# Altium PCB BLDC_Gimbal.PcbDoc (part 3 of 3)
Units mil, origin at the board's own origin, x right, y up, seen from the top; angles counter-clockwise.
Board outline 4133.86 x 2204.72 mil, 4 copper layers (Top Layer, GND, Power, Bottom Layer), stack 23.756 mil thick; 131 components, 105 nets, 517 pads, 595 vias.
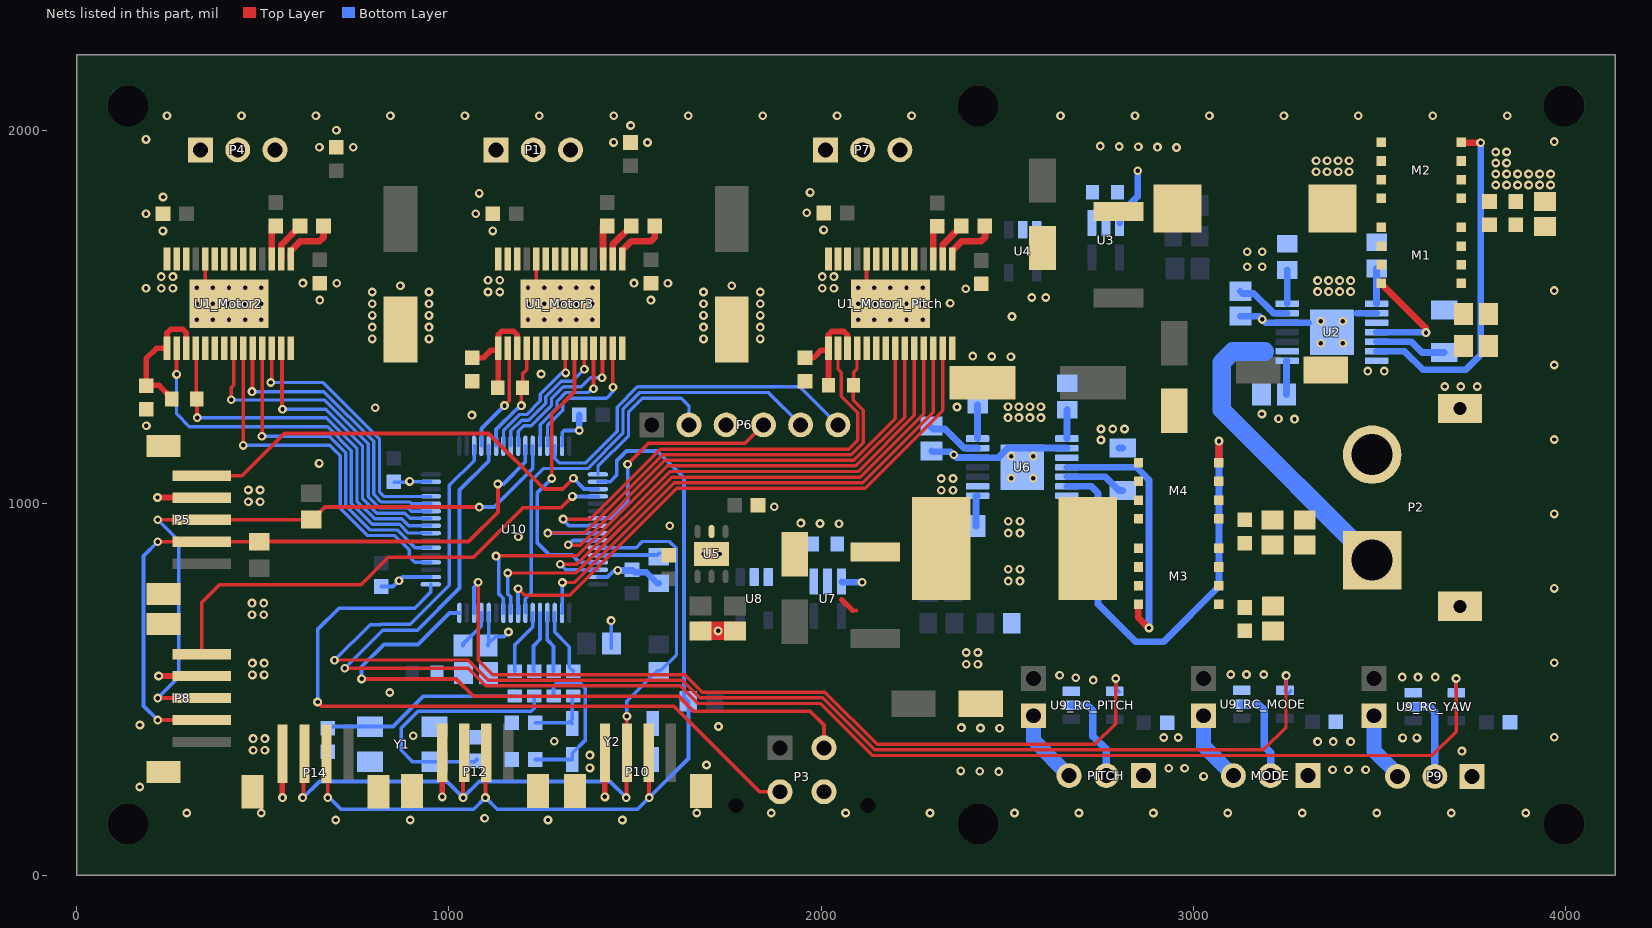
[diagram p4: the nets of this part, all layers, seen from the top]

## Via types
v1: diameter 23.62, hole 11.81, Top Layer to Bottom Layer, tented both sides, 540 vias
v2: diameter 23.62, hole 11.81, Top Layer to Bottom Layer, 55 vias

## Nets (pads, with @x,y where several pads share a name; then routed paths per layer and width w, separated by ;. In a path a pad name is that pad's centre, name@x,y a point inside that pad or via, vN(x,y) a via of type N, cw(c..) or ccw(c..) an arc to the next point about the centre after c; other vN are vias at no path point) (continued)
GND: C1_Motor1_Pitch.1 C1_Motor2.1 C1_Motor3.1 C1_Motor4.1 C1_Motor5.1 C2_Motor1_Pitch.2 C2_Motor2.2 C2_Motor3.2 C3_Motor1_Pitch.2 C3_Motor2.2 C3_Motor3.2 C5_Motor1_Pitch.1 C5_Motor2.1 C5_Motor3.1 C7.1 C8.1 C9.1 C11.2 C12.2 C13.2 C15.1 C16.1 C17.1 C18.1 C19.1 C20.1 C21.1 C23.2 C24.2 C27.1 C28.1 C29.1 C30.1 C31.1 C35_RC_MODE.1 C35_RC_PITCH.1 C35_RC_YAW.1 C36.1 C37.1 C38.1 C39.1 C40.1 C41.1 Cbyp1.1 Cbyp2.1 Cbyp3.1 Cbyp4.1 Css1.1 Css2.1 Cvcc1.1 Cvcc2.1 M2.1 M2.2 M2.3 M4.1 M4.2 M4.3 MODE.1 P2.2 P3.4 P5. P5.4 P6.3 P8. P8.4 P9.1 P10. P10.4 P12. P12.4 P14. P14.4 PITCH.1 R8.1 R12.1 R15.1 RL1.1 RL2.1 U1_Motor1_Pitch.6 U1_Motor1_Pitch.7 U1_Motor1_Pitch.10 U1_Motor1_Pitch.12 U1_Motor1_Pitch.13 U1_Motor1_Pitch.14 U1_Motor1_Pitch.19 U1_Motor1_Pitch.20 U1_Motor1_Pitch.21 U1_Motor1_Pitch.28 U1_Motor1_Pitch.29 U1_Motor2.6 U1_Motor2.7 U1_Motor2.10 U1_Motor2.12 U1_Motor2.13 U1_Motor2.14 U1_Motor2.19 U1_Motor2.20 U1_Motor2.21 U1_Motor2.28 U1_Motor2.29 U1_Motor3.6 U1_Motor3.7 U1_Motor3.10 U1_Motor3.12 U1_Motor3.13 U1_Motor3.14 U1_Motor3.19 U1_Motor3.20 U1_Motor3.21 U1_Motor3.28 U1_Motor3.29 U2.5 U2.9 U2.14 U2.15 U3.2 U4.2 U5.2 U5.7 U6.5 U6.9 U6.14 U6.15 U7.2 U8.2 U9_RC_MODE.3 U9_RC_PITCH.3 U9_RC_YAW.3 U10.12 U10.18 U10.31 U10.47 U10.63 Y1.2 Y1.4 Y2.2 Y2.3 | length 2588.7
  Top Layer w10: U1_Motor2.10@345.47,1655.51 345.47,1595.39 405.43,1535.43 v2(409.45,1535.43) ; U1_Motor3.10@1235.24,1655.51 1235.24,1595.39 1295.2,1535.43 v2(1299.21,1535.43) ; 2085.24,710.99 2093.53,710.99 2094.49,711.95 ; U1_Motor1_Pitch.10@2122.24,1655.51 2122.24,1595.39 2182.2,1535.43 v2(2186.22,1535.43)
  Top Layer w14: 2055.09,741.14 2085.24,710.99
  Top Layer w15: v1(217.52,1014.76) P5.4@335.63,1014.76 ; v1(220.47,535.43) P8.4@338.58,535.43 ; v1(553.15,208.66) P14.4@553.15,326.77 ; v1(982.28,210.63) P12.4@982.28,328.74 ; v1(1419.29,210.63) P10.4@1419.29,328.74
  Top Layer w50: C20.1@1676.18,656.5 v1(1723.43,656.5) C18.1@1768.7,656.5
  Bottom Layer w10: C41.1@818.9,775.59 850.39,775.59 v1(866.14,791.34) 875.98,801.18 U10.18@951.77,801.18 ; C40.1@853.35,1056.1 v1@894.68,1056.1 ; v1@895.67,1057.09 U10.31@951.77,1057.09 ; C37.1@1105.31,617.13 1105.31,621.06 C37.1@1107.28,623.03 ; U10.12@1107.28,704.72 C37.1@1107.28,623.03 ; v1(1160.43,653.54) 1148.54,641.65 1125.91,641.65 C37.1@1107.28,623.03 ; U10.47@1304.13,1153.54 1304.48,1153.89 1304.48,1189.25 1310.11,1194.88 v1(1350.39,1194.88) ; U10.63@1400.59,801.18 1426.47,801.18 1444.29,819.01 v1(1453.74,819.01) v1@1453.63,818.9 ; C31.1@1436.02,610.24 v1(1436.02,684.06) ; 3438.98,1509.98 3439.12,1509.84
  Bottom Layer w18: v1(1350.39,1194.88) C39.1@1350.39,1237.2 ; v1@1453.63,818.9 1494.61,818.9 1499.41,814.11 1530.38,814.11 1560.04,784.45 R15.1@1563.98,784.45 ; Css2.1@2297.24,1139.76 2299.21,1137.8 2348.43,1137.8 v1(2356.3,1129.92) 2364.17,1122.05 U6.5@2420.28,1122.05 2420.42,1121.91 2476.52,1121.91 2502.25,1147.64 U6.9@2660.43,1147.64 ; Css1.1@3125.98,1501.97 3176.18,1501.97 3193.9,1484.25 U2.5@3251.97,1484.25 3310.04,1484.25 ; 3439.12,1509.84 U2.9@3492.13,1509.84
  other v1: 696.26,148.62 896.26,148.62 1266.34,148.62 1466.34,148.62 1096.26,153.23 296.26,167.32 496.26,167.32 1665.95,167.32 1865.95,167.32 2065.94,167.32 2292.59,167.32 2519.68,167.32 2692.59,167.32 2892.59,167.32 3092.59,167.32 3292.59,167.32 3492.59,167.32 3692.59,167.32 3892.59,167.32 170.08,237.2 3027.56,265.75 2477.36,278.64 2375,280.41 2426.18,279.53 3374.02,283.46 3416.34,283.46 3462.6,283.46 2934.06,287.4 2976.38,287.4 1378.94,288.4 1692.3,296.26 1378.94,322.83 3721.46,333.66 474.41,335.63 505.91,335.63 3333.66,359.25 3375.98,359.25 3422.24,359.25 1283.46,360 474.41,367.13 505.91,367.13 3562.01,369.09 3600.39,369.09 2920.28,370.08 2959.65,370.08 3969.49,370.72 904.53,374.76 2479.33,394.89 2428.15,395.77 2376.97,396.65 1724.41,399.61 170.28,403.74 841.54,491.14 2731.3,524.23 2684.06,530.51 3561.02,532.48 3603.35,532.48 3649.61,532.48 2640.75,537.4 472.44,538.39 503.94,538.39 3100.39,539.37 3142.72,539.37 3188.98,539.37 2389.76,566.93 2421.26,566.93 472.44,569.88 503.94,569.88 3969.49,570.72 2389.76,598.42 2421.26,598.43 471.46,699.8 502.95,699.8 471.46,731.3 502.95,731.3 3969.49,770.72 2502.95,790.35 2534.45,790.35 2502.95,821.85 2534.45,821.85 1187.01,909.45 2502.95,919.29 2534.45,919.29 1593.5,938.98 2048.23,944.19 1997.05,945.08 1945.87,945.96 2502.95,950.79 2534.45,950.79 3969.49,970.72 1874.02,990.16 461.61,1003.52 493.11,1003.52 461.61,1035.01 493.11,1035.01 894.68,1058.07 651.57,1106.3 3969.49,1170.72 187.62,1207.68 3271.65,1225.39 3228.58,1226.38 1062.01,1236.22 3184.06,1239.17 802.17,1255.91 2365.16,1257.87 3675.2,1312.99 3718.5,1312.99 3762.8,1312.99 1248.03,1346.46 3468.5,1354.33 3512.8,1354.33 3969.49,1370.72 2509.84,1392.82 2458.66,1393.7 2407.48,1394.58 794.29,1440.94 946.85,1440.94 1684.06,1440.94 1836.61,1440.94 794.29,1472.44 946.85,1472.44 1684.05,1472.44 1836.61,1472.44 3185.04,1493.11 2512.8,1500.98 794.29,1503.94 946.85,1503.94 1684.05,1503.94 1836.61,1503.94 794.29,1535.43 946.85,1535.43 1684.05,1535.43 1836.61,1535.43 2346.46,1536.42 653.35,1545 1542.83,1545 2565.94,1552.17 2603.35,1552.17 794.29,1566.93 946.85,1566.93 1105.32,1566.93 1136.81,1566.93 1684.05,1566.93 1836.61,1566.93 3969.49,1570.72 2388.78,1575.79 186.73,1576.77 227.36,1576.77 258.86,1576.77 2002.95,1576.77 2034.45,1576.77 870.08,1583.66 1759.84,1583.66 699.1,1590.35 1588.58,1590.35 607.99,1590.75 1497.48,1590.75 1105.31,1598.43 1136.81,1598.43 227.36,1608.27 258.86,1608.27 2002.95,1608.27 2034.45,1608.27 3144.69,1634.84 3185.04,1634.84 3144.69,1675.2 3185.04,1675.2 232.09,1731.02 1117.91,1731.02 2006.69,1733.69 186.73,1776.77 1072.56,1776.77 1961.34,1779.44 232.48,1822.13 1081.69,1831.69 1970.47,1834.36 3812.01,1854.33 3841.54,1854.33 3871.06,1854.33 3900.59,1854.33 3930.12,1854.33 3959.65,1854.33 3812.01,1883.86 3841.54,1883.86 3871.06,1883.86 3900.59,1883.86 3930.12,1883.86 3959.65,1883.86 3812.01,1913.39 3841.54,1913.39 3812.01,1942.91 3841.54,1942.91 2954.72,1955.13 652.28,1955.91 743.39,1955.51 2903.54,1956.01 2852.36,1956.89 2801.18,1957.78 2750,1958.66 1533.74,1968.31 1442.64,1968.7 3969.49,1970.72 186.73,1976.77 698.03,2001.26 1488.39,2014.06 243.11,2040 443.11,2040 643.11,2040 843.11,2040 1043.11,2040 1243.11,2040 1443.11,2040 1643.11,2040 1843.11,2040 2043.11,2040 2243.11,2040 2643.11,2040 2843.11,2040 3043.11,2040 3243.11,2040 3443.11,2040 3643.11,2040 3843.11,2040
  other v2: 1684.06,863.19 1727.36,863.19 2510.83,1066.93 2569.88,1066.93 2510.83,1125.98 2569.88,1125.98 3342.52,1429.13 3401.57,1429.13 3342.52,1488.19 3401.57,1488.19 322.83,1492.13 366.14,1492.13 409.45,1492.13 452.76,1492.13 496.06,1492.13 1212.59,1492.13 1255.9,1492.13 1299.21,1492.13 1342.52,1492.13 1385.83,1492.13 2099.6,1492.13 2142.91,1492.13 2186.22,1492.13 2229.53,1492.13 2272.83,1492.13 322.83,1535.43 366.14,1535.43 452.76,1535.43 496.06,1535.43 1212.6,1535.43 1255.9,1535.43 1342.52,1535.43 1385.83,1535.43 2099.6,1535.43 2142.91,1535.43 2229.53,1535.43 2272.83,1535.43 322.83,1578.74 366.14,1578.74 409.45,1578.74 452.76,1578.74 496.06,1578.74 1212.6,1578.74 1255.9,1578.74 1299.21,1578.74 1342.52,1578.74 1385.83,1578.74 2099.6,1578.74 2142.91,1578.74 2186.22,1578.74 2229.53,1578.74 2272.83,1578.74
HEADER_UART_RX: P3.3 U10.17 | length 1903.3
  Top Layer w10: v1(647.64,465.55) 659.45,453.74 1605.32,453.74 1834.65,224.41 P3.3@1889.76,224.41
  Bottom Layer w10: v1(647.64,465.55) 647.64,660.43 704.72,717.52 908.46,717.52 951.77,760.83 U10.17@951.77,781.5
HEADER_UART_TX: P3.2 U10.16 | length 1709.7
  Top Layer w10: v1(765.75,527.56) 1019.68,527.56 1065.94,481.3 1617.13,481.3 1657.48,440.94 1970.47,440.94 2007.87,403.54 P3.2@2007.87,342.52
  Bottom Layer w10: v1(765.75,527.56) 765.75,560.04 825.79,620.08 917.32,620.08 1001.97,704.72 U10.16@1028.54,704.72
I2C1_SCL: P10.2 P12.2 P14.2 R3.1 U10.50 | length 2499.1
  Top Layer w10: v1@674.7,206.69 P14.2@674.7,326.77 ; v1@1098.43,210.63 P12.2@1098.43,329.23 ; P10.2@1537.4,328.74 P10.2@1538.39,329.72 ; v1(1538.39,208.66) 1537.89,209.15 1537.89,328.25 P10.2@1538.39,328.74
  Bottom Layer w10: v1@674.7,206.69 681.1,206.69 696.85,190.94 ; 698.34,189.46 710.63,177.17 1066.93,177.17 v1(1098.43,208.66) 1129.92,177.17 1506.89,177.17 v1(1538.39,208.66) 1643.7,313.98 R3.1@1643.7,467.52 1631.89,479.33 1631.89,1067.91 1560.04,1139.76 1477.36,1139.76 1450.79,1113.19 1450.79,1074.8 1433.42,1057.43 1400.94,1057.43 U10.50@1400.59,1057.09
  other v1: 674.7,208.66
I2C1_SDA: P10.3 P12.3 P14.3 R4.1 U10.59 | length 2133.6
  Top Layer w10: v1@607.28,206.69 609.74,209.15 609.74,324.8 P14.3@607.28,327.26 ; v1@1038.39,214.57 1038.39,327.76 1040.35,329.72 P12.3@1041.34,328.74 ; v1@1476.38,213.58 1477.36,214.57 1477.36,328.74 P10.3@1476.38,329.72 ; P10.3@1478.35,328.74 1477.85,329.23 1478.35,329.72 v1(1478.35,427.17)
  Bottom Layer w9: U10.59@1400.59,879.92 1502.95,879.92 1519.68,896.65 1592.52,896.65 1611.75,877.42 1611.75,593.05 1567.91,549.21 R4.1@1563.98,549.21 1560.04,549.21 1478.35,467.52 v1(1478.35,427.17)
  Bottom Layer w10: v1@607.28,206.69 652.56,251.97 995.08,251.97 v1(1038.39,208.66) 1081.69,251.97 1433.07,251.97 v1(1476.38,208.66)
  other v1: 607.28,208.66
I2C2_SCL: P5.2 P8.2 R1.1 U10.42 | length 1792.9
  Top Layer w10: v1(218.07,416.94) P8.2@336.18,416.94 ; v1(218.07,895.94) P5.2@336.18,895.94 490.87,895.94 R1.1@491.14,895.67 492.13,896.65 1053.15,896.65 1131.89,975.39 v1(1131.89,1051.18)
  Bottom Layer w10: v1(218.07,416.94) 180.12,454.9 180.12,857.99 v1(218.07,895.94) ; v1(1131.89,1051.18) 1146.65,1051.18 1205.36,1109.89 1205.36,1153.2 U10.42@1205.71,1153.54
I2C2_SDA: P5.3 P8.3 R2.1 U10.43 | length 1769.3
  Top Layer w10: v1(218.07,476) P8.3@336.18,476 ; v1(218.07,955) P5.3@336.18,955 629.21,955 R2.1@629.92,955.71 633.86,955.71 667.32,989.17 v1(1081.69,989.17)
  Bottom Layer w10: v1(218.07,476) 274.61,532.54 274.61,898.46 v1(218.07,955) ; v1(1081.69,989.17) 1122.05,989.17 1225.39,1092.52 U10.43@1225.39,1153.54
IMU_INT_1: P5.5 U10.51 | length 1197.5
  Top Layer w10: P5.5@336.18,1073.11 444.17,1073.11 558.07,1187.01 1106.89,1187.01 1256.5,1037.4 1305.78,1037.4 v1(1334.65,1066.27)
  Bottom Layer w10: v1(1334.65,1066.27) 1363.17,1037.75 1400.24,1037.75 U10.51@1400.59,1037.4
IMU_INT_2: P8.5 U10.52 | length 1321.6
  Top Layer w10: P8.5@336.18,594.11 336.18,732.83 383.86,780.51 763.78,780.51 837.6,854.33 1066.49,854.33 1199.36,987.2 1301.53,987.2 v1(1332.04,1017.72)
  Bottom Layer w10: v1(1332.04,1017.72) U10.52@1400.59,1017.72 U10.52@1400.94,1017.37
MOTOR1_EN1: U1_Motor1_Pitch.26 U10.2 | length 1439.3
  Top Layer w9: v1(1305.12,786.42) 1337.6,786.42 1605.83,1054.65 2112.04,1054.65 2301.38,1243.98 U1_Motor1_Pitch.26@2301.38,1415.35
  Bottom Layer w10: U10.2@1304.13,704.72 1304.48,705.07 1304.48,785.78 v1(1305.12,786.42)
MOTOR1_EN2: U1_Motor1_Pitch.24 U10.62 | length 1404.1
  Top Layer w9: v1(1299.21,835.63) 1344.05,835.63 1593.06,1084.65 2099.62,1084.65 2250.2,1235.23 U1_Motor1_Pitch.24@2250.2,1415.35
  Bottom Layer w10: v1(1299.21,835.63) 1313.98,820.87 U10.62@1400.59,820.87
MOTOR1_EN3: U1_Motor1_Pitch.22 U10.58 | length 1292.3
  Top Layer w9: v1@1320.87,886.81 1352.8,886.81 1580.68,1114.68 2087.23,1114.68 2199.02,1226.47 U1_Motor1_Pitch.22@2199.02,1415.35
  Bottom Layer w10: v1(1320.87,887.8) 1332.68,899.61 U10.58@1400.59,899.61
MOTOR1_IN1: U1_Motor1_Pitch.27 U10.8 | length 1585.9
  Top Layer w9: v1(1186.02,769.68) 1203.74,751.97 1324.8,751.97 1612.48,1039.65 2118.26,1039.65 2326.97,1248.36 U1_Motor1_Pitch.27@2326.97,1415.35
  Bottom Layer w10: U10.8@1186.02,704.72 v1(1186.02,769.68)
MOTOR1_IN2: U1_Motor1_Pitch.25 U10.9 | length 1580.7
  Top Layer w9: v1(1158.46,812.01) 1341.64,812.01 1599.28,1069.65 2105.83,1069.65 2275.79,1239.6 U1_Motor1_Pitch.25@2275.79,1415.35
  Bottom Layer w10: v1(1158.46,812.01) 1158.46,755.91 1166.34,748.03 U10.9@1166.34,704.72
MOTOR1_IN3: U1_Motor1_Pitch.23 U10.10 | length 1598
  Top Layer w9: v1(1126.77,857.44) 1127.27,857.94 1345.15,857.94 1586.89,1099.68 2093.44,1099.68 2224.61,1230.85 U1_Motor1_Pitch.23@2224.61,1415.35
  Bottom Layer w10: v1(1126.77,857.44) 1133.86,850.35 1133.86,756.89 1146.31,744.44 1146.31,705.07 U10.10@1146.65,704.72
MOTOR1_NFAULT: R5_Motor1_Pitch.1 U1_Motor1_Pitch.18 U10.57 | length 1351.5
  Top Layer w9: v1(1265.75,919.29) 1364.07,919.29 1574.46,1129.68 2081.02,1129.68 2113.43,1162.09 2113.43,1249.76 2086.81,1276.38 R5_Motor1_Pitch.1@2086.81,1315.94 2087.8,1316.93 2087.8,1351.57 2096.65,1360.43 U1_Motor1_Pitch.18@2096.65,1415.35
  Bottom Layer w10: v1(1265.75,919.29) U10.57@1400.59,919.29
MOTOR1_NRESET: U1_Motor1_Pitch.16 U10.56 | length 1250
  Top Layer w9: v1(1307.09,956.69) 1380.26,956.69 1568.25,1144.68 2074.8,1144.68 2098.43,1168.31 2098.43,1243.11 2054.13,1287.4 2054.13,1350.39 2045.47,1359.06 U1_Motor1_Pitch.16@2045.47,1415.35
  Bottom Layer w10: v1(1307.09,956.69) 1307.09,954.72 1322.83,938.98 U10.56@1400.59,938.98
MOTOR1_OUT1: P7.3 U1_Motor1_Pitch.5
MOTOR1_OUT2: P7.2 U1_Motor1_Pitch.8
MOTOR1_OUT3: P7.1 U1_Motor1_Pitch.9
MOTOR2_EN1: U1_Motor2.26 U10.29 | length 732.6
  Top Layer w10: v1(521.65,1323.82) 524.61,1326.77 U1_Motor2.26@524.61,1415.35
  Bottom Layer w9: v1(521.65,1323.82) 661.18,1323.82 813.98,1171.03 813.98,1029.53 825.79,1017.72 U10.29@951.77,1017.72
MOTOR2_EN2: U1_Motor2.24 U10.28 | length 805.2
  Top Layer w10: v1(471.46,1299.21) 472.44,1300.2 472.44,1414.37 U1_Motor2.24@473.43,1415.35
  Bottom Layer w9: v1(471.46,1299.21) 664.58,1299.21 798.23,1165.56 798.23,1023.62 819.13,1002.72 895.91,1002.72 900.59,998.03 U10.28@951.77,998.03
MOTOR2_EN3: U1_Motor2.22 U10.27 | length 884.2
  Top Layer w10: v1(415.35,1277.56) 415.35,1310.04 422.24,1316.93 U1_Motor2.22@422.24,1415.35
  Bottom Layer w9: v1(415.35,1277.56) 416.01,1276.9 665.67,1276.9 783.23,1159.35 783.23,1017.41 812.92,987.72 889.69,987.72 899.06,978.35 U10.27@951.77,978.35
MOTOR2_IN1: U1_Motor2.27 U10.26 | length 774.8
  Top Layer w10: U1_Motor2.27@550.2,1415.35 551.67,1413.88 551.67,1253.44 v1(553.15,1251.97)
  Bottom Layer w9: v1@558.07,1256.89 v1(553.15,1251.97) 558.07,1251.97 669.39,1251.97 768.23,1153.14 768.23,1011.2 806.71,972.72 881.89,972.72 895.94,958.66 U10.26@951.77,958.66
MOTOR2_IN2: U1_Motor2.25 U10.22 | length 900.2
  Top Layer w10: v1(498.03,1179.13) 498.52,1179.63 498.52,1414.86 U1_Motor2.25@499.02,1415.35
  Bottom Layer w9: v1@496.06,1177.17 v1(498.03,1179.13) 678.59,1179.13 723.19,1134.53 723.19,992.6 788.07,927.72 819.84,927.72 819.88,927.68 861.44,927.68 909.2,879.92 U10.22@951.77,879.92
MOTOR2_IN3: U1_Motor2.23 U10.20 | length 988.7
  Top Layer w10: U1_Motor2.23@447.83,1415.35 447.83,1286.2 448.01,1286.02 448.01,1267.13 447.83,1266.95 447.83,1155.05 v1(448.07,1154.81)
  Bottom Layer w9: v1@447.83,1154.58 v1(448.07,1154.81) 680.82,1154.81 708.17,1127.46 708.17,998.52 ; 708.19,998.5 708.19,986.38 781.85,912.72 813.63,912.72 ; U10.20@951.77,840.55 908.46,840.55 893.7,855.31 893.7,874.21 855.23,912.68 813.67,912.68 ; 813.63,912.72 813.67,912.68
MOTOR2_NFAULT: R5_Motor2.1 U1_Motor2.18 U10.25 | length 1018.8
  Top Layer w10: R5_Motor2.1@321.24,1281.12 U1_Motor2.18@321.24,1414 ; v1@323.56,1230.05 R5_Motor2.1@323.56,1278.8
  Top Layer w15: U1_Motor2.18@319.88,1415.35 U1_Motor2.18@321.24,1414 ; R5_Motor2.1@321.24,1281.12 R5_Motor2.1@322.83,1279.53 R5_Motor2.1@323.56,1278.8 ; v1@323.56,1230.05 v1(324.28,1229.33)
  Bottom Layer w9: v1(324.28,1229.33) 670.82,1229.33 753.23,1146.92 753.23,1004.98 800.49,957.72 874.02,957.72 892.76,938.98 U10.25@951.77,938.98
MOTOR2_NRESET: U1_Motor2.16 U10.24 | length 1074.9
  Top Layer w10: v1(268.7,1345.47) U1_Motor2.16@268.7,1415.35
  Bottom Layer w9: v1(268.7,1345.47) 268.7,1239.17 303.15,1204.72 674.21,1204.72 738.19,1140.75 738.19,998.81 794.28,942.72 867.62,942.72 891.04,919.29 U10.24@951.77,919.29
MOTOR2_OUT1: P4.3 U1_Motor2.5
MOTOR2_OUT2: P4.2 U1_Motor2.8
MOTOR2_OUT3: P4.1 U1_Motor2.9
MOTOR3_EN1: U1_Motor3.26 U10.41 | length 414.1
  Top Layer w10: v1(1411.42,1336.61) 1412.89,1338.09 1412.89,1413.88 U1_Motor3.26@1414.37,1415.35
  Bottom Layer w9: U10.41@1186.02,1153.54 1186.37,1153.89 1186.37,1192.28 1201.77,1207.68 1221.56,1207.68 1275.71,1261.83 1275.71,1279.67 1307.93,1311.89 1355.75,1311.89 1380.47,1336.61 v1(1411.42,1336.61)
MOTOR3_EN2: U1_Motor3.24 U10.40 | length 373.4
  Top Layer w10: U1_Motor3.24@1363.19,1415.35 1363.68,1414.86 1363.68,1359.74 v1(1364.17,1359.25)
  Bottom Layer w9: U10.40@1166.34,1153.54 1166.68,1153.89 1166.68,1193.8 1195.56,1222.68 1215.35,1222.68 1260.71,1268.04 1260.71,1285.88 1301.71,1326.89 1331.81,1326.89 v1(1364.17,1359.25)
MOTOR3_EN3: U1_Motor3.22 U10.39 | length 349.9
  Top Layer w10: U1_Motor3.22@1312.01,1415.35 1312.99,1414.37 1312.99,1350.39 v1(1313.98,1349.41)
  Bottom Layer w9: U10.39@1146.65,1153.54 1147,1153.89 1147,1195.33 1189.35,1237.68 1209.13,1237.68 1245.71,1274.25 1245.71,1292.1 1302.04,1348.43 1312.99,1348.43 v1(1313.98,1349.41)
MOTOR3_IN1: U1_Motor3.27 U10.45 | length 395.7
  Top Layer w10: U1_Motor3.27@1439.96,1415.35 1440.45,1414.86 1440.45,1311.52 v1(1440.94,1311.02)
  Bottom Layer w9: U10.45@1264.76,1153.54 1265.11,1153.89 1265.11,1208.8 1305.71,1249.4 1305.71,1267.25 1320.35,1281.89 1423.62,1281.89 1440.94,1299.21 v1(1440.94,1311.02)
MOTOR3_IN2: U1_Motor3.25 U10.44 | length 359.5
  Top Layer w10: v1(1388.78,1307.09) 1388.61,1307.26 1388.61,1415.18 U1_Motor3.25@1388.78,1415.35
  Bottom Layer w9: U10.44@1245.08,1153.54 1244.73,1153.89 1245.43,1154.58 1245.43,1210.33 1290.71,1255.61 1290.71,1273.46 1314.14,1296.89 1374.9,1296.89 1385.09,1307.09 v1(1388.78,1307.09)
MOTOR3_IN3: U1_Motor3.23 U10.61 | length 748.6
  Top Layer w10: v1(1276.57,1065.94) 1276.57,1238.19 1337.6,1299.21 U1_Motor3.23@1337.6,1415.35
  Bottom Layer w10: v1(1276.57,1065.94) 1237.2,1026.57 1237.2,893.7 1270.67,860.24 1331.69,860.24 1351.38,840.55 U10.61@1400.59,840.55
MOTOR3_NFAULT: R5_Motor3.1 U1_Motor3.18 U10.38 | length 306.2
  Top Layer w10: v1(1194.88,1261.81) 1194.88,1291.34 1209.65,1306.1 R5_Motor3.1@1204.72,1311.02 ; R5_Motor3.1@1198.33,1309.55 1198.33,1346.95 1209.65,1358.27 U1_Motor3.18@1209.65,1415.35
  Bottom Layer w10: U10.38@1126.97,1153.54 1126.97,1197.22 1182.93,1253.18 1186.25,1253.18 1188.41,1255.34 1192.72,1259.65 v1(1194.88,1261.81)
MOTOR3_NRESET: U1_Motor3.16 U10.36 | length 294.4
  Top Layer w10: v1(1149.61,1261.81) 1162.32,1274.53 1162.32,1411.5 U1_Motor3.16@1158.46,1415.35
  Bottom Layer w10: U10.36@1087.6,1153.54 1087.6,1199.8 v1(1149.61,1261.81)
MOTOR3_OUT1: P1.3 U1_Motor3.5
MOTOR3_OUT2: P1.2 U1_Motor3.8
MOTOR3_OUT3: P1.1 U1_Motor3.9
NetC3_Motor1_Pitch_1: C3_Motor1_Pitch.1 R5_Motor1_Pitch.2 U1_Motor1_Pitch.15 U1_Motor1_Pitch.17 | length 317.7
  Top Layer w15: C3_Motor1_Pitch.1@1950,1389.76 1979.53,1389.76 2000.2,1410.43 2014.96,1410.43 U1_Motor1_Pitch.15@2019.88,1415.35 ; R5_Motor1_Pitch.2@2024.8,1311.02 R5_Motor1_Pitch.2@2019.88,1315.94 2019.88,1451.77 2028.74,1460.63 2061.43,1460.63 2071.06,1450.99 U1_Motor1_Pitch.17@2071.06,1415.35
NetC3_Motor2_1: C3_Motor2.1 R5_Motor2.2 U1_Motor2.15 U1_Motor2.17 | length 368.5
  Top Layer w15: R5_Motor2.2@255.91,1279.53 255.91,1281.5 221.46,1315.94 187.99,1315.94 C3_Motor2.1@187.01,1314.96 187.01,1387.8 214.57,1415.35 U1_Motor2.15@243.11,1415.35 243.11,1456.69 252.95,1466.54 285.5,1466.54 294.29,1457.75 U1_Motor2.17@294.29,1415.35
NetC3_Motor3_1: C3_Motor3.1 R5_Motor3.2 U1_Motor3.15 U1_Motor3.17 | length 318.6
  Top Layer w15: C3_Motor3.1@1062.99,1389.76 1092.52,1389.76 1113.19,1410.43 1127.95,1410.43 U1_Motor3.15@1132.87,1415.35 ; R5_Motor3.2@1137.8,1311.02 1132.87,1315.94 1132.87,1451.77 1142.72,1461.61 1173.43,1461.61 1184.06,1450.99 U1_Motor3.17@1184.06,1415.35
NetC4_Motor1_Pitch_1: C4_Motor1_Pitch.1 U1_Motor1_Pitch.3 | length 87.6
  Top Layer w18: U1_Motor1_Pitch.3@2301.38,1655.51 C4_Motor1_Pitch.1@2301.38,1743.11
NetC4_Motor2_1: C4_Motor2.1 U1_Motor2.3 | length 87.6
  Top Layer w18: U1_Motor2.3@524.61,1655.51 C4_Motor2.1@524.61,1743.11
NetC4_Motor3_1: C4_Motor3.1 U1_Motor3.3 | length 89
  Top Layer w10: C4_Motor3.1@1413.39,1744.09 C4_Motor3.1@1414.37,1743.11
  Top Layer w18: U1_Motor3.3@1414.37,1655.51 C4_Motor3.1@1414.37,1743.11
NetC6_Motor1_Pitch_1: C6_Motor1_Pitch.1 U1_Motor1_Pitch.2 | length 109.4
  Top Layer w18: U1_Motor1_Pitch.2@2326.97,1655.51 2327.11,1655.65 2327.11,1694.04 C6_Motor1_Pitch.1@2377.17,1744.09
NetC6_Motor1_Pitch_2: C6_Motor1_Pitch.2 U1_Motor1_Pitch.1 | length 155.3
  Top Layer w18: U1_Motor1_Pitch.1@2352.56,1655.51 2352.56,1677.87 2378.16,1703.46 2430.04,1703.46 2440.16,1713.58 C6_Motor1_Pitch.2@2440.16,1744.09
NetC6_Motor2_1: C6_Motor2.1 U1_Motor2.2 | length 109.4
  Top Layer w18: U1_Motor2.2@550.06,1655.37 U1_Motor2.2@550.2,1655.51 550.2,1693.9 C6_Motor2.1@600.25,1743.95
NetC6_Motor2_2: C6_Motor2.2 U1_Motor2.1 | length 155.3
  Top Layer w18: U1_Motor2.1@575.79,1655.51 575.79,1677.87 601.38,1703.46 653.27,1703.46 663.39,1713.58 C6_Motor2.2@663.39,1744.09
NetC6_Motor3_1: C6_Motor3.1 U1_Motor3.2 | length 109.4
  Top Layer w18: U1_Motor3.2@1439.96,1655.51 1440.1,1655.65 1440.1,1694.04 C6_Motor3.1@1490.16,1744.09
NetC6_Motor3_2: C6_Motor3.2 U1_Motor3.1 | length 155.3
  Top Layer w18: U1_Motor3.1@1465.55,1655.51 1465.55,1677.87 1491.15,1703.46 1543.03,1703.46 1553.15,1713.58 C6_Motor3.2@1553.15,1744.09
NetC10_1: C10.1 L1.1 M1.1 M1.2 M1.3 M2.5 M2.6 M2.7 M2.8 R6.2 U2.10
  other v1: 3329.72,1889.76 3359.25,1889.76 3388.78,1889.76 3418.31,1889.76 3329.72,1919.29 3359.25,1919.29 3388.78,1919.29 3418.31,1919.29
NetC10_2: C10.2 U2.12 | length 193.9
  Bottom Layer w18: U2.12@3492.13,1433.07 3492.35,1432.85 3585.85,1432.85 3614.17,1404.53 C10.2@3674.21,1404.53
NetC22_1: C22.1 L2.1 M3.1 M3.2 M3.3 M4.5 M4.6 M4.7 M4.8 R10.2 U6.10 | length 9.8
  Bottom Layer w18: C22.1@2800.2,1147.64 C22.1@2810.04,1147.64
  other v1: 2751.97,1169.29 2751.97,1198.82 2783.46,1198.82 2814.96,1198.82
NetC22_2: C22.2 U6.12 | length 165.1
  Bottom Layer w18: U6.12@2660.43,1070.87 2762.8,1070.87 2800.2,1033.46 C22.2@2810.04,1033.46
NetC36_2: C36.2 C37.2 L3.2 U10.13 | length 108
  Bottom Layer w10: C37.2@1038.39,617.13 1038.39,621.06 1087.25,669.93 1087.25,704.38 U10.13@1087.6,704.72
NetCss1_2: Css1.2 U2.6 | length 150.4
  Bottom Layer w18: Css1.2@3125.98,1568.9 3131.89,1562.99 3162.11,1562.99 3215.11,1509.98 3251.83,1509.98 U2.6@3251.97,1509.84
NetCss2_2: Css2.2 U6.6 | length 146.8
  Bottom Layer w18: Css2.2@2296.26,1202.76 2300.2,1198.82 2332.68,1198.82 2383.72,1147.78 2420.13,1147.78 U6.6@2420.28,1147.64
NetCvcc1_2: Cvcc1.2 U2.1 | length 92.4
  Bottom Layer w18: Cvcc1.2@3250,1291.34 3250,1381.75 3250.14,1381.89 U2.1@3251.97,1381.89
NetCvcc2_2: Cvcc2.2 U6.1 | length 85.5
  Bottom Layer w18: Cvcc2.2@2416.34,937.99 2416.34,1019.54 2416.48,1019.68 U6.1@2420.28,1019.68
NetJ1_1: J1.1 P9.3 | length 189.1
  Bottom Layer w40: J1.1@3485.24,428.54 3485.24,334.65 3548.62,271.26 P9.3@3548.62,265.75
NetJ2_1: J2.1 MODE.3 | length 193.9
  Bottom Layer w40: J2.1@3027.56,428.54 3027.56,347.54 MODE.3@3107.38,267.72
NetJ3_1: J3.1 PITCH.3 | length 200.3
  Bottom Layer w40: J3.1@2570.87,428.54 2570.87,362.99 PITCH.3@2666.14,267.72
NetL1_2: L1.2 RS1.1 U3.3 | length 161
  Bottom Layer w18: U3.3@2802.17,1751.71 2802.17,1774.71 2850.39,1822.94 v1(2850.39,1892.72)
NetL2_2: L2.2 RS2.1 U7.3 | length 55.7
  Bottom Layer w18: U7.3@2055.12,788.85 2056.57,787.4 v1(2110.24,787.4)
NetM1_4: M1.4 U2.11 | length 315.9
  Top Layer w18: M1.4@3504.52,1590.35 3504.52,1589.96 3623.92,1470.56 3623.92,1458.75 v1(3625,1457.68)
  Bottom Layer w18: U2.11@3492.13,1458.66 3492.27,1458.52 3624.16,1458.52 v1(3625,1457.68)
NetM2_4: M2.4 U2.13 | length 938.4
  Top Layer w18: M2.4@3719.88,1968.7 3720.48,1968.11 3771.06,1968.11 v1(3771.65,1967.52)
  Bottom Layer w18: U2.13@3492.13,1407.48 3566.93,1407.48 3616.14,1358.27 3732.28,1358.27 3771.65,1397.64 v1(3771.65,1967.52)
NetM3_4: M3.4 U6.11 | length 708.8
  Top Layer w18: M3.4@2852.95,728.15 2852.36,727.56 2852.36,691.93 2879.92,664.37 v1(2880.91,664.37)
  Bottom Layer w18: U6.11@2660.43,1096.46 2846.46,1096.46 2880.91,1062.01 v1(2880.91,664.37)
NetM4_4: M4.4 U6.13 | length 1266.8
  Top Layer w18: M4.4@3068.31,1107.87 3068.6,1108.17 3068.6,1166.04 v1(3068.9,1166.34)
  Bottom Layer w18: U6.13@2660.43,1045.28 2725.28,1045.28 2744.09,1026.46 2744.09,728.35 2845.47,626.97 2919.29,626.97 3068.9,776.57 3068.9,1160.43 v1(3068.9,1166.34)
NetR6_1: R6.1 U2.8 | length 94.5
  Bottom Layer w18: U2.8@3492.13,1535.43 R6.1@3492.13,1629.92
NetR9_1: R9.1 U6.7 | length 90.6
  Bottom Layer w18: U6.7@2420.28,1173.23 R9.1@2420.28,1263.78
NetR10_1: R10.1 U6.8 | length 78.2
  Bottom Layer w18: U6.8@2660.43,1173.23 2660.43,1250 R10.1@2661.42,1250.98
NetR13_1: R13.1 U10.5 | length 164.7
  Bottom Layer w10: R13.1@1229.33,548.23 1227.36,550.2 1227.36,616.14 1245.08,633.86 U10.5@1245.08,704.72
NetR14_1: R14.1 U10.6 | length 176.5
  Bottom Layer w10: R14.1@1177.17,548.23 1177.17,618.94 1225.39,667.17 U10.6@1225.39,704.72
NetR15_2: R15.2 U10.60 | length 168.4
  Bottom Layer w10: U10.60@1400.59,860.24 1559.06,860.24 1563.98,865.16 R15.2@1566.93,865.16
NetR16_2: R16.2 U10.3 | length 177.3
  Bottom Layer w10: U10.3@1284.45,704.72 1284.45,653.54 1323.82,614.17 1323.82,559.06 R16.2@1334.65,548.23
NetR17_2: R17.2 U10.4 | length 163.4
  Bottom Layer w10: U10.4@1264.76,704.72 1264.76,631.89 1281.5,615.16 R17.2@1281.5,548.23
NetRL1_2: RL1.2 U3.1 U4.3
NetRL2_2: RL2.2 U7.1 U8.3
NetRon1_1: Ron1.1 U2.7 | length 90.6
  Bottom Layer w18: U2.7@3251.97,1535.43 Ron1.1@3251.97,1625.98
NRST: P6.5 U10.7 | length 1257.5
  Bottom Layer w9: U10.7@1205.71,704.72 1205.71,743.11 1221.46,758.86 1221.46,1060.04 1254.09,1092.68 1373.63,1092.68 1467.76,1186.8 1467.76,1251.66 1512.98,1296.89 1858.19,1296.89 P6.5@1945.08,1210
RC_MODE_IN: MODE.2 U9_RC_MODE.2 | length 250.5
  Bottom Layer w20: U9_RC_MODE.2@3129.92,459.65 3130.91,458.66 3176.18,458.66 3189.96,444.88 3189.96,346.46 3207.38,329.04 MODE.2@3207.38,267.72
RC_MODE_PIN: U9_RC_MODE.4 U10.35 | length 3676.8
  Top Layer w9: v1(692.91,577.76) 693.57,578.41 1051.07,578.41 1105.62,523.86 1627.28,523.86 1674.52,476.61 2004.24,476.61 2144.01,336.85 3188.23,336.85 3249.02,397.64 v1(3249.02,536.42)
  Bottom Layer w9: v1(692.91,577.76) 788.62,673.46 815.91,673.46 816.41,673.96 896.95,673.96 1001.53,778.54 1001.53,1047.68 1001.48,1047.74 1067.91,1114.17 U10.35@1067.91,1153.54
  Bottom Layer w10: v1(3249.02,536.42) 3249.02,498.03 3247.05,496.06 3254.92,488.19 U9_RC_MODE.4@3261.81,495.08
RC_PITCH_IN: PITCH.2 U9_RC_PITCH.2 | length 253.2
  Bottom Layer w20: U9_RC_PITCH.2@2672.24,456.69 2715.55,456.69 2730.32,441.93 2730.32,374.02 2766.14,338.19 PITCH.2@2766.14,267.72
RC_PITCH_PIN: U9_RC_PITCH.4 U10.14 | length 2287.4
  Top Layer w9: v1(1078.74,787.4) 1078.74,577.76 1117.64,538.86 1633.49,538.86 1680.73,491.61 2010.46,491.61 2150.22,351.85 2735.71,351.85 2791.34,407.48 v1(2791.34,528.54)
  Bottom Layer w10: U10.14@1067.91,704.72 1067.91,772.89 1078.74,783.72 v1(1078.74,787.4) ; v1(2791.34,528.54) 2791.34,504.92 2790.35,503.94 U9_RC_PITCH.4@2801.18,493.11
RC_YAW_IN: P9.2 U9_RC_YAW.2 | length 237
  Bottom Layer w20: U9_RC_YAW.2@3590.55,452.76 3634.84,452.76 3648.62,438.98 P9.2@3648.62,265.75
RC_YAW_PIN: U9_RC_YAW.4 U10.37 | length 4102.3
  Top Layer w9: v1(720.47,556.1) 1052.17,556.1 1099.41,508.86 1621.06,508.86 1668.31,461.61 1998.03,461.61 2137.8,321.85 3641.73,321.85 3705.71,385.83 v1(3705.71,528.54)
  Bottom Layer w10: v1(720.47,556.1) 822.83,658.46 915.59,658.46 1028.78,771.65 1028.78,1034.68 1107.28,1113.19 U10.37@1107.28,1153.54 ; v1(3705.71,528.54) 3705.71,491.14 U9_RC_YAW.4@3706.69,490.16
SWO: P6.4 U10.55 | length 608.9
  Top Layer w10: v1(1480.32,1104.33) 1536.42,1160.43 1795.51,1160.43 P6.4@1845.08,1210
  Bottom Layer w10: U10.55@1400.59,958.66 1400.94,959.01 1438.01,959.01 1480.32,1001.31 v1(1480.32,1104.33)
TCK: P6.2 U10.49 | length 440
  Bottom Layer w9: U10.49@1400.59,1076.77 1400.59,1098.43 1482.76,1180.59 1482.76,1245.45 1519.2,1281.89 1624.61,1281.89 1645.08,1261.42 P6.2@1645.08,1210
TMS: P6.6 U10.46 | length 964
  Bottom Layer w9: U10.46@1284.45,1153.54 1284.68,1153.31 1284.68,1119.84 1296.85,1107.68 1367.42,1107.68 1452.76,1193.02 1452.76,1257.87 1506.77,1311.89 1943.19,1311.89 P6.6@2045.08,1210
VBATT: C7.2 C8.2 C9.2 C15.2 C16.2 C17.2 Cbyp1.2 Cbyp2.2 Cbyp3.2 Cbyp4.2 M1.5 M1.6 M1.7 M1.8 M3.5 M3.6 M3.7 M3.8 P2.1 R9.2 Ron1.2 U2.2 U6.2 | length 826.6
  Bottom Layer w50: 3191.93,1406.99 3105.81,1406.99 3075.79,1376.97 3075.79,1250.98 P2.1@3480.31,846.46
  other v1: 2322.84,1034.45 2354.33,1034.45 2322.83,1065.94 2354.33,1065.94 2501.97,1229.33 2531.5,1229.33 2561.02,1229.33 2590.55,1229.33 2501.97,1258.86 2531.5,1258.86 2561.02,1258.86 2590.55,1258.86 3333.66,1567.91 3363.19,1567.91 3392.72,1567.91 3422.24,1567.91 3333.66,1597.44 3363.19,1597.44 3392.72,1597.44 3422.24,1597.44
X32IN: C29.2 R16.1 Y2.1 | length 177.4
  Bottom Layer w10: C29.2@1232.28,409.45 Y2.1@1321.85,409.45 ; Y2.1@1331.69,407.48 1329.72,409.45 Y2.1@1321.85,409.45 ; R16.1@1334.65,481.3 1331.61,478.27 1331.61,419.21 Y2.1@1321.85,409.45
X32OUT: C30.2 R17.1 Y2.4 | length 426.9
  Bottom Layer w10: C30.2@1232.28,311.02 Y2.4@1331.69,311.02 1331.69,327.76 1366.14,362.2 1366.14,502.76 1351.19,517.72 1291.34,517.72 1281.5,507.87 R17.1@1281.5,481.3
XIN: C27.2 R13.2 Y1.1 | length 690.7
  Bottom Layer w10: C27.2@1075.79,311.02 1069.88,305.12 Y1.1@961.61,305.12 902.56,305.12 872.05,335.63 872.05,395.67 917.32,440.94 1221.5,440.94 1229.33,448.77 R13.2@1229.33,481.3
XOUT: C28.2 R14.2 Y1.3 | length 537.8
  Bottom Layer w10: C28.2@675.2,394.69 680.12,399.61 Y1.3@788.39,399.61 850.39,399.61 932.09,481.3 R14.2@1177.17,481.3
pads on no net: E1.0 E2.0 E3.0 E4.0 E5.0 E6.0 P3.0 U2.3 U5.3 U5.5 U6.3 U9_RC_MODE.1 U9_RC_PITCH.1 U9_RC_YAW.1 U10.21 U10.23 U10.30 U10.33 U10.34 U10.53 U10.54

## Polygon pours and split planes (outlines as drawn)
VBATT on Top Layer "Top Layer-VBATT" (solid, pour order 29): 3026.6,694.88 3543.31,694.88 3646.65,798.23 3764.76,798.23 3885.83,798.23 3988.19,900.59 3988.19,935.04 3988.19,1771.65 3691.93,1771.65 3691.93,1559.06 3764.76,1559.06 3764.76,1382.87 3819.88,1327.76 3819.88,1194.88 3598.43,973.43 3395.67,973.43 3337.6,915.35 3025.59,915.35
GND on Top Layer "Top Layer-GND" (solid, pour order 131): 137.8,2066.93 137.8,137.8 3996.06,137.8 3996.06,2066.93
GND on Top Layer "Top Layer-GND 1" (solid, pour order 129): 135.83,2059.06
3.3VDC on Top Layer "Top Layer-3.3VDC 1" (solid, pour order 53): 1640.01,559.79 1639.27,559.06 1397.61,559.06 1325.79,632.87 1325.79,704.75 1397.61,776.57 1473.43,776.57 1473.43,820.87 1680.12,820.87 1680.12,697.83 1631.89,697.83 1631.89,619.09 1632.87,618.11 1801.18,618.11 1801.18,519.68 1680.12,519.68
NetC22_1 on Top Layer "Top Layer-NetC22_1 2" (solid, pour order 37): 2812.01,757.87 2794.29,740.16 2637.8,740.16 2637.8,1104.69 2694.88,1219.49 2874.02,1219.49 2874.02,757.87
12VDC on Top Layer "Top Layer-12VDC 2" (solid, pour order 89): 3025.59,1616.14 3110.24,1616.14 3110.24,1530.51 3181.59,1460.14 3243.11,1398.62 3243.11,1310.04 3078.25,1310.04 3029.04,1359.25 2876.48,1359.25 2833.66,1316.44 2833.66,1264.76 2832.68,1265.75 2630.91,1265.75 2630.91,1540.35 2706.69,1616.14
NetL2_2 on Top Layer "Top Layer-NetL2_2" (solid, pour order 43): 2078.74,739.17 2404.53,739.17 2404.53,1016.73 2225.39,1016.73 2078.74,894.68
12VDC on Top Layer "Top Layer-12VDC" (solid, pour order 87): 2524.61,1779.53 2670.28,1779.53 2670.28,1990.16 2493.11,1990.16 2432.09,1929.13 2266.76,1929.13 2266.76,1625 2267.1,1624.02 2284.48,1624.02 2284.48,1779.53 2477.39,1779.53 2477.39,1709.65 2449.83,1682.09 2399.63,1682.09 2399.63,1624.02 2524.61,1624.02
MOTOR1_OUT1 on Top Layer "Top Layer-MOTOR3_OUT1" (solid, pour order 85): 2259.06,1624.02 2259.06,1989.17 2172.44,1989.17 2172.44,1902.56 2216.59,1857.28 2216.59,1718.37 2241.34,1693.62 2241.34,1624.02
MOTOR1_OUT2 on Top Layer "Top Layer-MOTOR3_OUT2" (solid, pour order 83): 2164.57,1624.02 2164.57,1819.88 2066.14,1918.31 2066.14,1989.17 2160.63,1989.17 2160.63,1898.62 2207.87,1851.38 2207.87,1718.5 2182.28,1693.41 2182.28,1624.02
MOTOR1_OUT3 on Top Layer "Top Layer-MOTOR3_OUT3" (solid, pour order 81): 1972.64,1989.17 2054.33,1989.17 2054.33,1915.35 2156.69,1812.99 2156.69,1624.02 2138.98,1624.02 2138.98,1696.85 2113.39,1722.44 2113.39,1809.06 2109.45,1812.99 2041.54,1812.99 1972.64,1881.89
12VDC on Top Layer "Top Layer-12VDC 1" (solid, pour order 79): 2041.54,1694.04 2083.72,1694.04 2087.8,1689.96 2087.8,1624.02 2105.51,1624.02 2105.51,1804.13 2041.54,1804.13
12VDC on Top Layer "Top Layer-12VDC 3" (solid, pour order 77): 507.87,1624.02 507.87,1783.47 692.91,1783.47 692.91,1707.68 663.1,1677.87 629.21,1677.87 629.21,1624.02 1021.65,1624.02 1021.65,1918.31 1022.64,1919.29 580.71,1919.29 580.71,1895.62 527.51,1895.62 490.16,1858.27 490.16,1624.02
MOTOR2_OUT1 on Top Layer "Top Layer-MOTOR2_OUT1" (solid, pour order 73): 438.98,1874.02 491.14,1926.18 491.14,1989.17 572.83,1989.17 572.83,1903.54 523.62,1903.54 482.28,1862.2 482.28,1624.02 464.57,1624.02 464.57,1690.95 438.98,1716.54
MOTOR2_OUT2 on Top Layer "Top Layer-MOTOR2_OUT2" (solid, pour order 71): 405.51,1624.02 387.8,1624.02 387.8,1989.17 483.27,1989.17 483.27,1930.07 431.1,1877.9 431.1,1716.54 405.51,1690.94
MOTOR2_OUT3 on Top Layer "Top Layer-MOTOR2_OUT3" (solid, pour order 69): 362.2,1624.02 379.92,1624.02 379.92,1989.17 284.45,1989.17 284.45,1870.87 336.61,1818.7 336.61,1716.54 362.2,1690.94
12VDC on Top Layer "Top Layer-12VDC 1" (solid, pour order 67): 264.76,1694.04 306.94,1694.04 311.02,1689.96 311.02,1624.02 328.74,1624.02 328.74,1804.13 264.76,1804.13
5VDC on Top Layer "Top Layer-5VDC" (solid, pour order 59): 1733.27,697.83 1733.27,820.87 1762.8,820.87 1762.8,905.51 1733.27,905.51 1733.27,1017.72 1790.35,1017.72 1790.35,967.52 1818.97,967.52 1857.21,788.46 1893.7,751.97 2012.8,751.97 2092.83,671.94 2229.64,671.94 2331.69,569.88 2331.69,399.61 2307.09,375 2168.31,375 2021.65,521.65 1827.76,521.65 1827.76,668.31 1798.23,697.83
NetC22_1 on Top Layer "Top Layer-NetC22_1" (solid, pour order 61): 1994.09,766.73
NetC22_1 on Top Layer "Top Layer-NetC22_1 1" (solid, pour order 51): 2845.47,1875.98
NetL1_2 on Top Layer "Top Layer-NetL1_2" (solid, pour order 49): 2732.28,1921.26 3029.53,1921.26 3030.51,1643.7 2916.34,1641.73 2912.4,1641.73 2818.9,1641.73 2869.09,1641.73 2732.28,1758.86
MOTOR3_OUT2 on Top Layer "Top Layer-MOTOR3_OUT2" (solid, pour order 47): 1277.56,1624.02 1277.56,1819.88 1179.13,1918.31 1179.13,1989.17 1273.62,1989.17 1273.62,1898.62 1320.87,1851.38 1320.87,1718.5 1295.28,1693.41 1295.28,1624.02
MOTOR3_OUT1 on Top Layer "Top Layer-MOTOR3_OUT1" (solid, pour order 45): 1372.05,1624.02 1372.05,1989.17 1285.43,1989.17 1285.43,1902.56 1329.59,1857.28 1329.59,1718.37 1354.33,1693.62 1354.33,1624.02
NetC10_1 on Top Layer "Top Layer-NetC10_1" (solid, pour order 41): 3292.32,1618.11 3284.45,1625.98 3284.45,1975.39 3295.28,1986.22 3522.64,1986.22 3522.64,1618.11
NetC22_1 on Top Layer "Top Layer-NetC22_1 3" (solid, pour order 33): 2914.37,687.99
3.3VDC on Top Layer "Top Layer-3.3VDC" (solid, pour order 22): 3584.65,753.94
12VDC on Top Layer "Top Layer-12VDC" (solid, pour order 8): 1380.26,1624.02 1397.64,1624.02 1397.64,1779.53 1590.55,1779.53 1590.55,1709.65 1562.99,1682.09 1512.8,1682.09 1512.8,1624.02 1931.1,1624.02 1931.1,1929.13 1379.92,1929.13 1379.92,1625
MOTOR3_OUT3 on Top Layer "Top Layer-MOTOR3_OUT3" (solid, pour order 2): 1085.63,1989.17 1167.32,1989.17 1167.32,1915.35 1269.68,1812.99 1269.68,1624.02 1251.97,1624.02 1251.97,1696.85 1226.38,1722.44 1226.38,1809.05 1222.44,1812.99 1154.53,1812.99 1085.63,1881.89
12VDC on Top Layer "Top Layer-12VDC 1" (solid, pour order 0): 1154.53,1694.04 1196.71,1694.04 1200.79,1689.96 1200.79,1624.02 1218.5,1624.02 1218.5,1804.13 1154.53,1804.13
VBATT on Power "Power-VBATT" (solid, pour order 93): 3144.69,1144.68 3226.38,1226.38 3226.38,1774.32 3223.14,1777.56 3989.17,1777.56 3989.17,900.59 3884.84,796.26 3644.69,796.26 3543.31,694.88 2774.59,694.88 2774.59,986.22 2250.41,986.22 2250.41,1201.15 2408.42,1201.73 2490.16,1283.46 2603.26,1283.46 2742.32,1144.68
3.3VDC on Power "Power-3.3VDC" (solid, pour order 14): 1696.85,1187.93 1722.38,1162.4 1722.44,1162.4 1971.46,1162.4 2199.8,934.06 2708.66,934.06 2718.5,934.06 2718.5,653.05 2307.58,653.05 1920.28,1040.35 1727.94,1040.35 1684.06,973.43 1684.06,733.27 1801.18,616.14 1801.18,526.57 1727.36,452.76 1727.36,139.76 1725.39,137.8 137.8,137.8 137.8,1260.83 1696.85,1260.83
12VDC on Power "Power-12VDC 1" (solid, pour order 10): 3055.12,1296.26 2665.2,1296.26 2580.55,1382.87 137.8,1382.87 137.8,2066.93 3055.12,2066.93
5VDC on Power "Power-5VDC" (solid, pour order 16): 1891.73,987.13 1824.81,987.13 1755.91,987.13 1755.91,864.31 1846.46,820.06 1846.45,140.75 3852.36,140.75 3854.33,138.78 3854.33,604.33 2239.17,604.33
12VDC on Power "Power-12VDC 2" (solid, pour order 95): 3256.89,715.55
12VDC on Power "Power-12VDC1" (solid, pour order 28): 2490.16,2367.13
12VDC on Power "Power-12VDC" (solid, pour order 12): 2490.16,2367.13
GND on Bottom Layer "Bottom Layer-GND" (solid, pour order 125): 140.55,2064.4 140.55,135.26 3998.82,135.26 3998.82,2064.4
GND on Bottom Layer (solid, pour order 135): 922.24,1285.23
GND on Bottom Layer (solid, pour order 133): 921.74,1280.51 918.79,1277.56 902.45,1277.56
3.3VDC on Bottom Layer "Bottom Layer-3.3VDC 1" (solid, pour order 55): 1740.19,788.85 1649.61,788.85 1649.61,603.84 1679.13,574.31 1679.13,434.06 1810.04,434.06 1810.04,703.59
3.3VDC on Bottom Layer "Bottom Layer-3.3VDC 2" (solid, pour order 121): 1597.44,750 1532.48,750 1532.48,661.42 1542.32,651.57 1542.32,597.44 1587.6,597.44 1588.58,596.46 1588.58,652.56 1597.44,661.42
NetC36_2 on Bottom Layer "Bottom Layer-NetC36_2" (solid, pour order 119): 1064.96,513.78 1064.96,646.65 1012.8,646.65 948.82,582.68 948.82,513.78
NetC10_1 on Bottom Layer "Bottom Layer-NetC10_1" (solid, pour order 117): 3461.61,1475.39 3555.12,1475.39 3572.83,1493.11 3709.65,1493.11 3709.65,1636.81 3609.25,1760.83 3449.8,1948.82 3287.4,1948.82 3287.4,1854.33 3464.57,1677.17 3464.57,1723.43 3464.57,1677.17 3518.7,1677.17 3546.26,1649.61 3546.26,1501.97 3537.4,1493.11 3461.61,1493.11
NetC22_1 on Bottom Layer "Bottom Layer-NetC22_1" (solid, pour order 115): 2628.94,1113.19 2845.47,1113.19 2845.47,1304.13 2804.13,1345.47 2633.86,1345.47 2633.86,1298.23 2688.98,1298.23 2715.55,1271.65 2715.55,1135.83 2710.63,1130.91 2628.94,1130.91
3.3VDC on Bottom Layer "Bottom Layer-3.3VDC 3" (solid, pour order 113): 2719.49,765.9 2719.98,712.11 2833.66,598.43 2926.18,598.43 2962.6,634.84 3778.54,634.84 3807.09,606.3 3807.09,391.73 3695.87,391.73 3683.07,404.53 3683.07,428.15 3729.33,428.15 3730.31,428.15 3754.92,451.77 3754.92,531.5 3717.52,568.9 3711.61,572.83 3396.65,572.83 3366.14,542.32 3366.14,458.66 3339.57,432.09 3339.57,392.72 3240.16,392.72 3222.44,410.43 3222.44,435.04 3268.7,435.04 3292.32,458.66 3292.32,542.32 3261.81,572.83 2963.58,572.83 2942.91,552.17 2914.37,552.17 2914.37,454.72 2886.81,427.17 2886.81,389.76 2782.48,389.76 2765.75,406.5 2765.75,433.07 2808.07,433.07 2840.55,465.55 2840.55,556.1 2708.66,556.1 2636.32,628.44 2569.88,628.94 2569.88,765.9
VBATT on Bottom Layer "Bottom Layer-VBATT" (solid, pour order 111): 3280.51,1673.23 3312.01,1641.73 3312.01,1546.26 3440.94,1546.26 3440.94,1663.39 3383.86,1720.47 3225.39,1720.47 3225.39,1673.23
VBATT on Bottom Layer "Bottom Layer-VBATT 1" (solid, pour order 109): 3277.56,1398.62 3215.55,1398.62 3207.68,1389.76 3139.76,1389.76 3139.76,1424.21 3207.68,1424.21 3215.55,1416.34 3277.56,1416.34
no net on Bottom Layer "Bottom Layer-No Net" (solid, pour order 107): 3251.97,1398.62
12VDC on Bottom Layer "Bottom Layer-12VDC" (solid, pour order 105): 2638.78,1356.3 2879.92,1356.3 3023.62,1356.3 3023.62,1548.23 2976.38,1595.47 2976.38,1745.08 2892.72,1745.08 2842.52,1694.88 2638.78,1694.88 2638.78,1591.54
NetRL1_2 on Bottom Layer "Bottom Layer-NetRL1_2" (solid, pour order 103): 2565.94,1710.63 2661.42,1710.63 2739.17,1710.63 2739.17,1794.29 2748.03,1803.15 2748.03,1854.33 2703.74,1854.33 2692.91,1843.5 2692.91,1783.46 2667.32,1757.87 2565.94,1757.87
NetRL2_2 on Bottom Layer "Bottom Layer-NetRL2_2" (solid, pour order 101): 1846.46,777.56 1870.08,753.94 1992.13,753.94 1992.13,841.54 1995.08,844.49 1995.08,909.45 1930.12,909.45 1845.47,824.8
VBATT on Bottom Layer "Bottom Layer-VBATT 2" (solid, pour order 99): 2447.83,1311.02 2479.33,1279.53 2479.33,1209.65 2608.27,1209.65 2608.27,1301.18 2551.18,1358.27 2392.72,1358.27 2392.72,1311.02
VBATT on Bottom Layer "Bottom Layer-VBATT 3" (solid, pour order 97): 2445.87,1036.42 2383.86,1036.42 2375.98,1027.56 2375.98,1020.67 2308.07,1020.67 2308.07,1078.74 2375.98,1078.74 2375.98,1062.01 2383.86,1054.13 2445.87,1054.13
5V_Buck_Feedback on Bottom Layer "Bottom Layer-5V_Buck_Feedback" (solid, pour order 91): 2326.77,799.21 2326.77,642.72 2469.49,642.72 2469.49,716.54 2386.81,799.21
5VDC on Bottom Layer "Bottom Layer-5VDC" (solid, pour order 63): 1839.57,404.53 1837.6,402.56 1837.6,299.21 1939.96,299.21 1939.96,404.53 2313.98,404.53 2313.98,805.12 2174.21,805.12 2105.32,736.22 1963.58,736.22 1885.28,621.06 1837.6,621.06 1837.6,404.53
3.3VDC on Bottom Layer "Bottom Layer-3.3VDC" (solid, pour order 57): 1317.91,730.31 1317.91,678.15 1319.39,678.15 1341.54,660.43 1341.54,592.52 1397.64,590.55 1397.64,699.8 1431.1,733.27 1511.81,733.27 1511.81,787.4 1375,787.4
GND on GND (split plane): 4113.76,2184.63 4113.76,20.1 20.1,20.1 20.1,2184.63

## Other copper
Top Layer:
  pour cut-out: 1074.29,835.49
  pour cut-out: 1050.2,838.09 1062.99,825.3 1062.99,798.72 1071.11,798.72 1079.72,807.33
  pour cut-out: 572.48,1608.72 629.21,1608.72 629.21,1624.22
  pour cut-out: 1512.8,1608.72 1489.7,1608.72 1489.41,1609.02 1489.41,1620.71 1504.29,1620.71 1506.89,1618.11
  pour cut-out: 2371.44,1625.98
  pour cut-out: 2361.03,1609.02 2399.34,1609.02 2399.83,1634.08
  pour cut-out: 593.5,1619.09 598.42,1624.02 629.21,1624.02 629.21,1617.4 627.95,1616.14 596.46,1616.14
  pour cut-out: 1071.85,1070.87 1125.51,1124.53 1157.48,1124.53 1157.48,1121.06 1177.17,1101.38
  pour cut-out: 776.57,975.39 965.55,975.39 968.5,972.44 965.55,969.49 965.55,909.47 772.65,909.47 769.68,906.5
  pour cut-out: 525.59,880.91 526.57,881.89 694.88,881.89 694.88,794.29 690.94,790.35 530.51,790.35
Bottom Layer:
  pour cut-out: 2614.92,1186.75 2614.67,1186.75 2605.9,1195.52 2615.86,1195.52 2622.4,1188.98
  pour cut-out: 2462.6,1182.09 2483.27,1202.76 2477.64,1202.76 2472.72,1207.68 2455.6,1190.56 2455.6,1187.99
  pour cut-out: 1811.2,777.54 1812.17,776.57 1838.58,776.57 1838.58,769.14 1840.55,767.17
  pour cut-out: 813.67,892.8
  pour cut-out: 787.4,900.59 787.4,866.14 790.35,863.19 793.31,866.14 812.01,866.14
  pour cut-out: 965.55,1144.68 948.82,1127.95 948.82,1127.46 949.31,1127.46 962.6,1114.17 981.3,1132.87 981.3,1137.8
  pour cut-out: 2732.28,468.5 2734.72,468.5 2749.43,483.22 2759.56,473.09 2755.08,473.09 2740.65,458.66
  pour cut-out: 3199.8,465.97 3213.41,479.57 3225.8,479.57 3232.28,473.09 3216.87,457.68 3208.42,457.68
  pour cut-out: 3676.18,474.72 3663.64,474.72 3652.56,463.63 3661.27,454.92 3661.27,452.73 3663.56,452.73 3682.29,471.46
  pour cut-out: 2278.54,1000.56 2296.93,1000.56 2310.15,1013.78 2316.93,1007.01 2316.93,1003.94
  pour cut-out: 792.2,564.96 873.1,564.96 876.97,568.82 874.62,571.18 874.62,575.82
  pour cut-out: 195.87,690.94 258.86,690.94 258.86,675.2 257.87,674.21 255.82,676.26 194.88,676.26
  pour cut-out: 3682.09,1693.9 3756.89,1693.9 3756.89,1677.17 3689.96,1677.17 3684.06,1683.07
  pour cut-out: 3170.51,1609.49 3171.26,1610.24 3209.65,1610.24 3209.65,1605.08 3234.25,1580.47 3231.3,1577.52 3231.3,1550.2 3199.8,1550.2 3170.51,1579.49
  pour cut-out: 2527.12,1611.22 2557.87,1611.22 2567.86,1601.22 2567.86,1579.16 2557.6,1579.16 2527.12,1548.67
  pour cut-out: 2666.14,1770.45 2664.37,1772.22 2664.37,1789.37 2629.2,1789.37 2626.97,1791.6 2622.05,1786.68 2622.05,1767.1
  pour cut-out: 1709.65,1859.14 1710.22,1858.57 1813.98,1858.57 1813.98,1664.11 1814.7,1663.39 1707.68,1663.39 1707.68,1859.25 1708.66,1860.24
  pour cut-out: 818.42,1855.32 818.42,1857.47 824.13,1863.19 921.74,1863.19 921.74,1667.82 927.17,1662.4 815.45,1662.4 815.45,1853.6 819.13,1857.28

## Silkscreen, mask and mechanical layers (free items; w line width, h text height)
Top Overlay:
  lines w7.87: 1726.38,137.8 1726.38,1295.28 ; 1726.38,1295.28 1726.38,1313.98 1728.35,1315.94 137.8,1315.94 1705.71,1315.94 1726.38,1295.28 ; 137.8,137.8 3984.25,137.8 3996.06,137.8 3996.06,2066.93 137.8,2066.93 137.8,137.8

## Text inside footprints (layer, text, board x,y; h text height)
P2: Top Overlay "FLAT" at 3740.16,633.86 h60 r180; Top Overlay "NOTCH" at 3775.59,1405.51 h60 r180; Top Overlay "SHROUDED MALE" at 3838.58,1358.27 h60 r270
U3: Mechanical 13 "*" at 2750.36,1742.71 h50 r90; Bottom Overlay "*" at 2709.76,1774.71 h20 r90
U7: Mechanical 13 "*" at 1999.31,779.85 h50 r90; Bottom Overlay "*" at 1961.31,811.35 h20 r90